# Altium PCB GY80-MOD-.PcbDoc
Units mm, origin at the board's own origin, x right, y up, seen from the top; angles counter-clockwise.
Board outline 127 x 101.6 mm, 4 copper layers (Top Layer, Internal Plane 1, Internal Plane 2, Bottom Layer); 15 components, 16 nets, 70 pads, 2 vias.
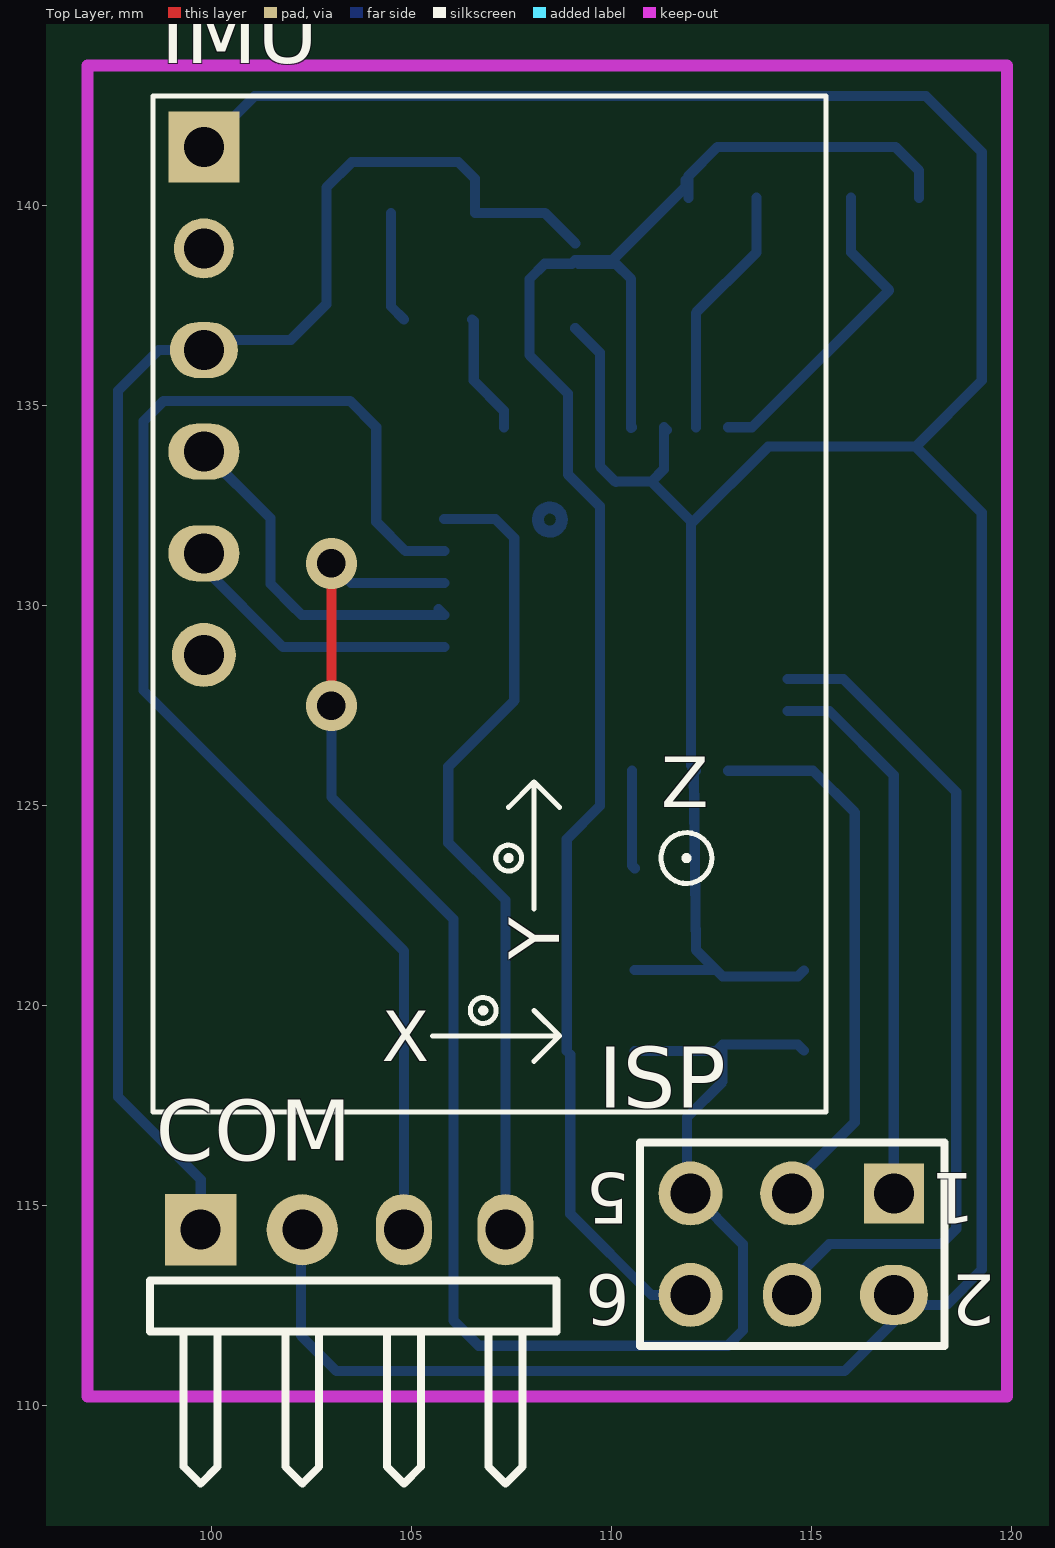
[diagram p0: Top Layer view]
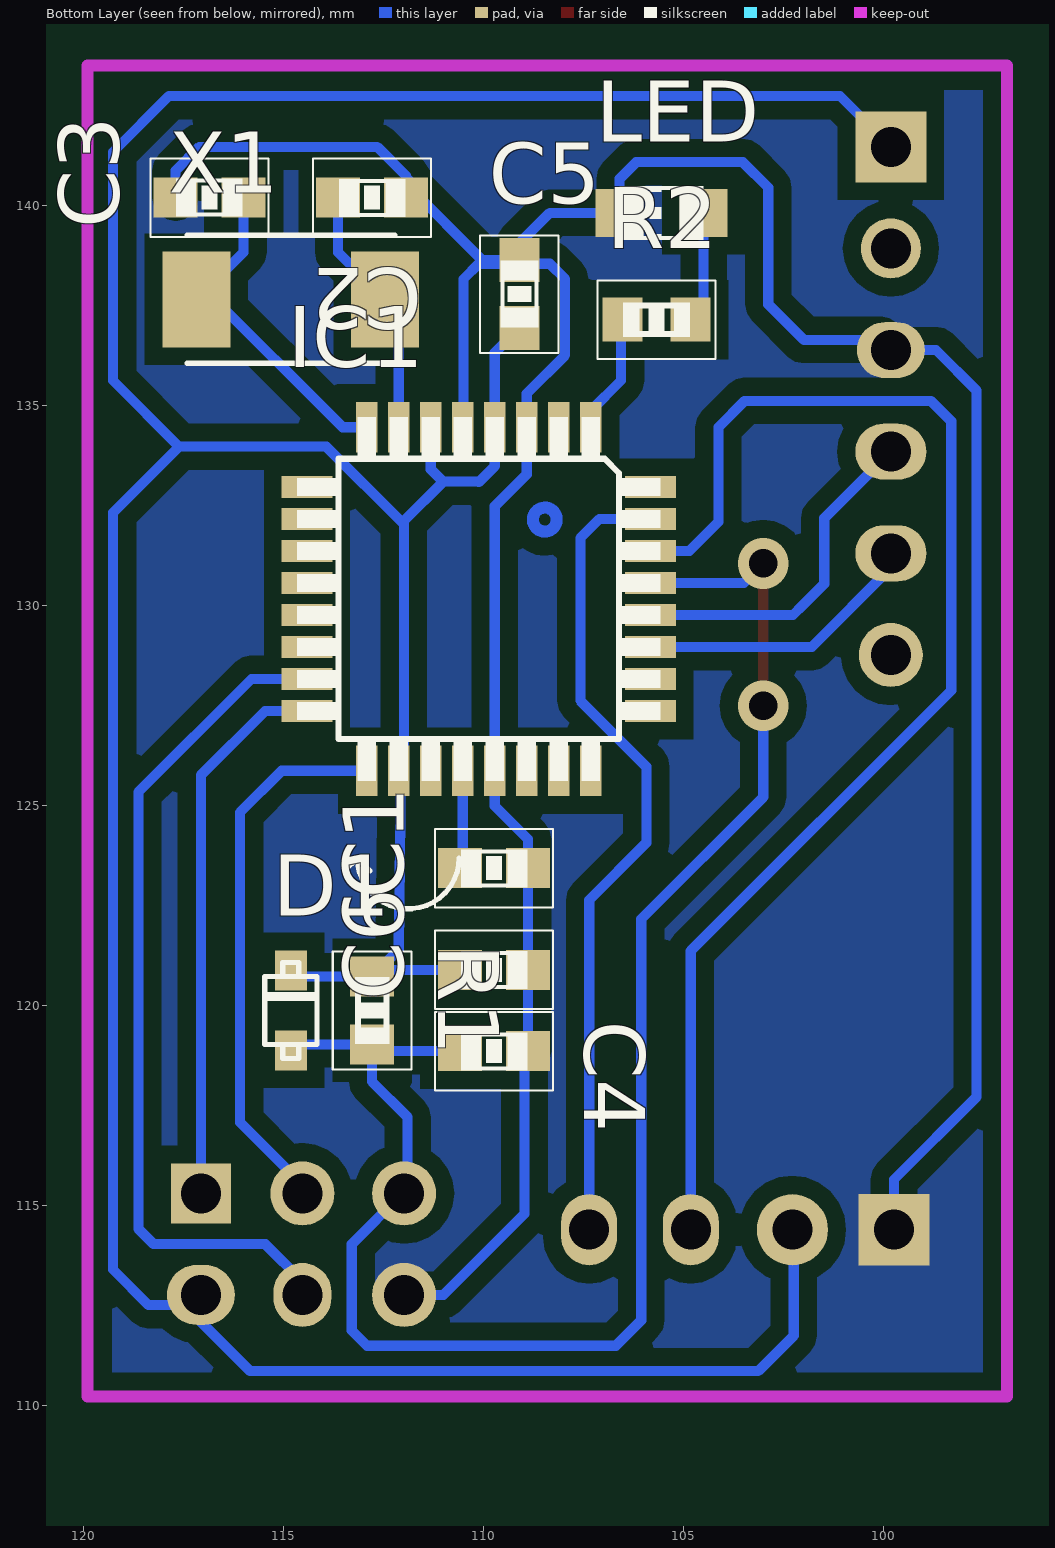
[diagram p1: Bottom Layer view, seen from below]
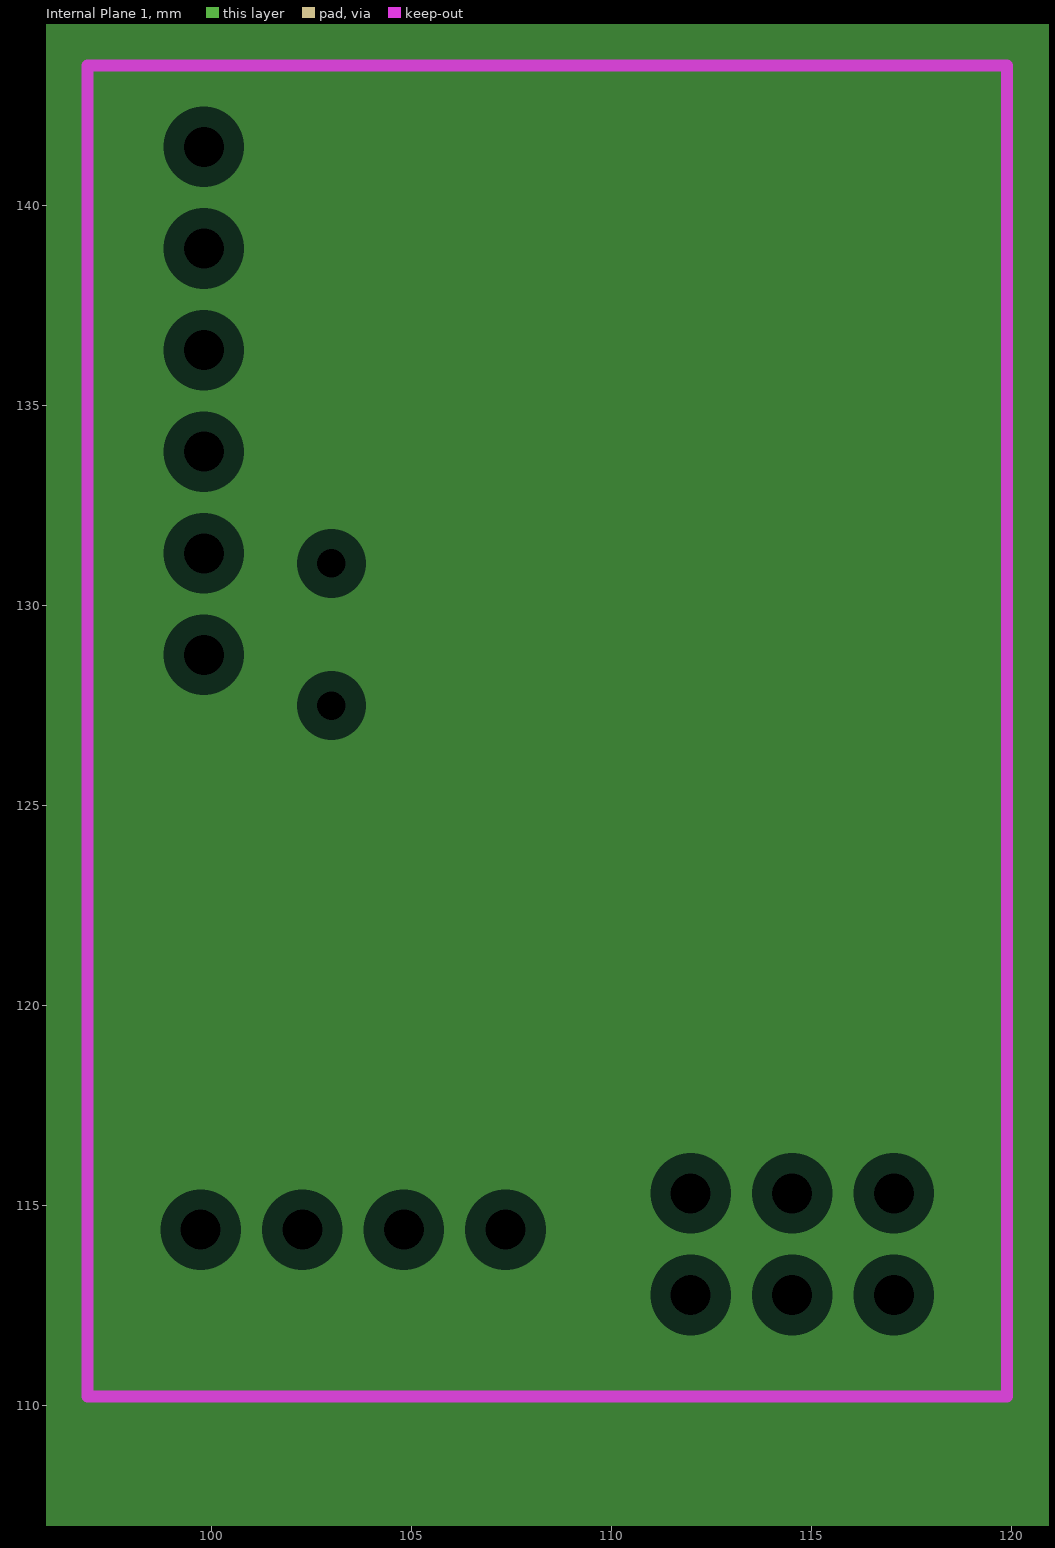
[diagram p2: Internal Plane 1, clearances drawn from the general rule]
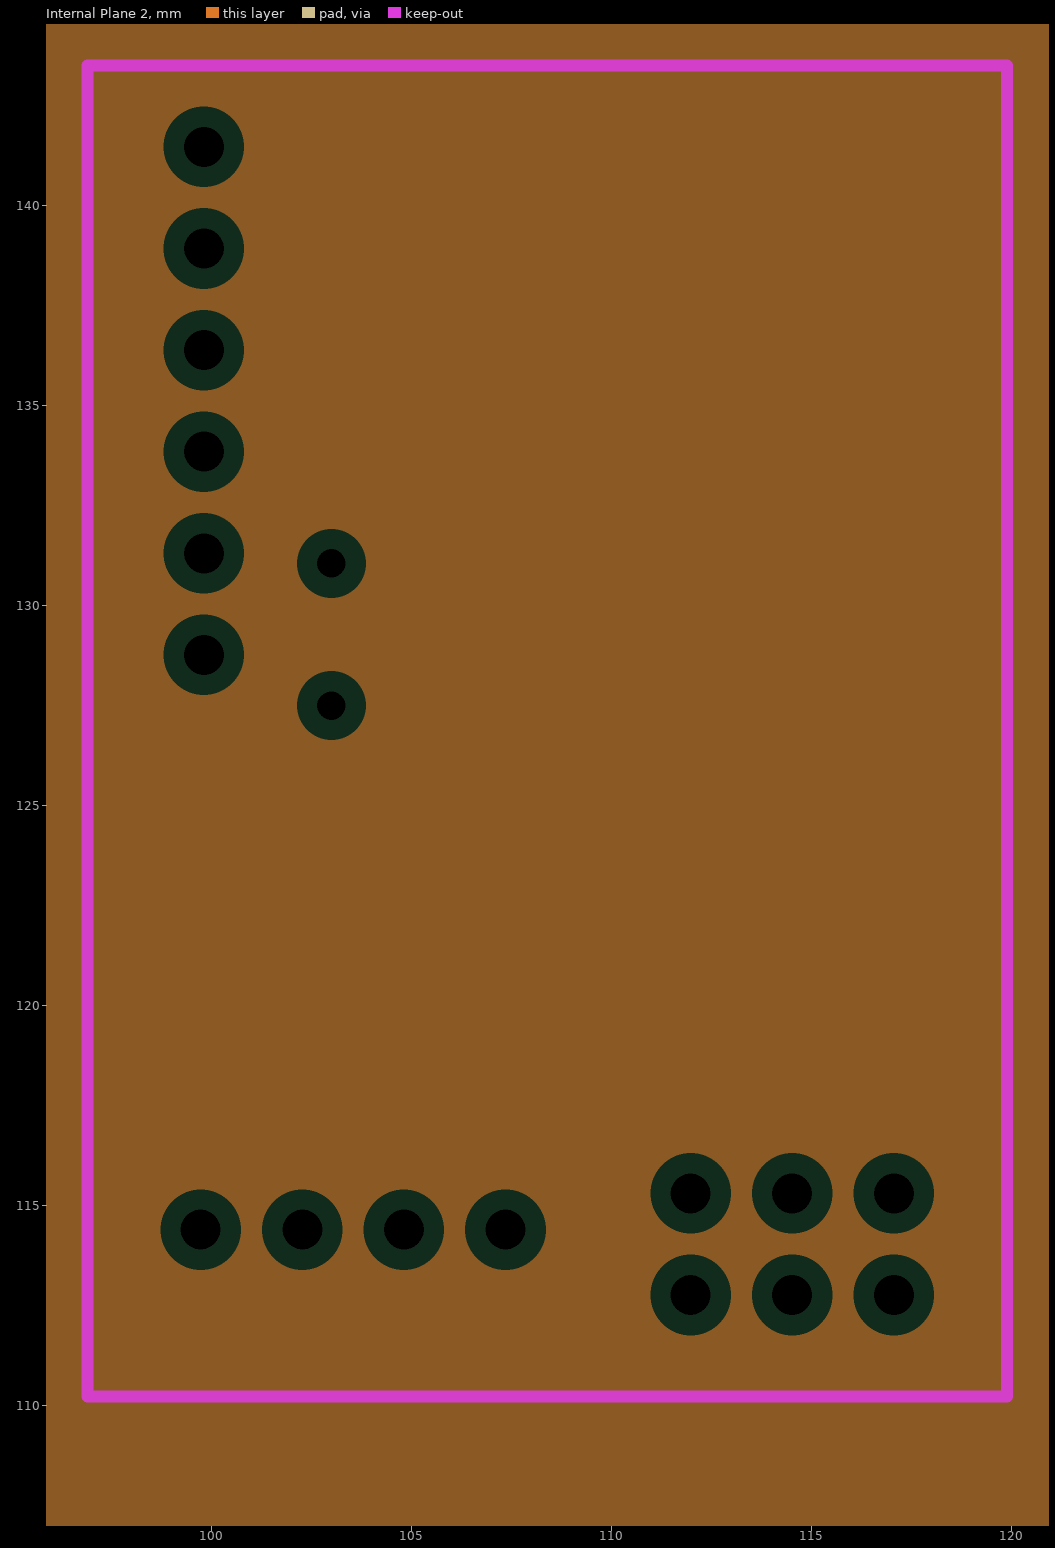
[diagram p3: Internal Plane 2, clearances drawn from the general rule]

## Layer stack, top to bottom
Top Layer: signal copper 0.0356
Dielectric: dielectric 0.32, FR-4, Dk 4.8
Internal Plane 1: plane copper 0.0356
Dielectric: dielectric 0.32, FR-4, Dk 4.8
Internal Plane 2: plane copper 0.0356
Dielectric: dielectric 0.32, FR-4, Dk 4.8
Bottom Layer: signal copper 0.0356

## Board outline
50.8,76.2 177.8,76.2 177.8,177.8 50.8,177.8

## Design rules (kind name [scope] priority, off if disabled: settings)
Clearance [All] p1: gap=0.45
ComponentClearance [All] p1: gap=0.254 collisioncheckmode=3 verticalgap=0.254
PlaneClearance [All] p1: clearance=0.508
PlaneConnect [All] p1: planeconnectstyle=Direct reliefexpansion=0.508 reliefentries=4 reliefconductorwidth=0.254 reliefairgap=0.254
PolygonConnect [All] p1: connectstyle=Direct reliefconductorwidth=0.254 reliefentries=4 polygonreliefangle="90 Angle"
RoutingVias [All] p1: holewidth=0.6 width=1 viastyle="Through Hole" minholewidth=0.711 minwidth=1.27 maxholewidth=0.711 maxwidth=1.27
SolderMaskExpansion [All] p1: expansion=0.102
TestPointUsage [All] p1: valid=0 allowmultiple=FALSE
Testpoint [All] p1: side=15 testpointundercomponent=TRUE minsize=1.016 maxsize=2.54 preferedsize=1.524 minholesize=0 maxholesize=1.016 preferedholesize=0.813 testpointgrid=0.025 style=1023 order=0123456789
Width [All] p1: maxlimit=0.254 minlimit=0.254 preferedwidth=0.254
16 further rules are at their usual default settings.

## Components (designator, comment, footprint, x,y, rotation, side; value= is the part's Value field where it differs from the comment)
C1 "100n" C0603 109.728,123.444 r0 bottom
C2 "22p" C0603 112.776,140.208 r0 bottom
C3 "22p" C0603 116.84,140.208 r180 bottom
C4 "100n" C0603 109.728,118.872 r0 bottom
C5 "100n" C0603 109.093,137.795 r270 bottom
C6 "100n" C0603 109.728,120.904 r0 bottom
COM "Header 4H" HDR1X4H 99.728,114.408 r0 top
D1 "1N4004" SOD-323F 114.808,119.888 r90 bottom
IC1 "ATMEGA328P-AN" TQFP32-10 110.109,130.175 r270 bottom
IMU "Header 6H" GY-80-MINNH 98.537,117.348 r0 top
ISP "Header 3X2" HDR2X3 117.056,115.316 r180 top
LED "Green" CHIP-LED0805 105.537,139.827 r90 bottom
R1 "10K" R0603 112.776,119.888 r270 bottom
R2 "1K" R0603 105.664,137.16 r0 bottom
X1 "16MHz" CRYSTAL-TXC-7A2 114.808,137.668 r180 bottom

## Footprints (in the part's own frame and the unit in brackets; to place one, negate y for a bottom-side part, rotate by r counter-clockwise, add the part's x,y. Pads: shape width x height; smd on the part's side, far side on the other; paste and mask are expansions set on the pad)
C0603 [mm]
  rect 1.1x1 smd: 1(-0.85,0) 2(0.85,0)
  silkscreen extent -1.47,-0.98 1.47,0.98
CHIP-LED0805 [mm]
  rect 1.2x1.2 smd: A(0,-1.05) C(0,1.05)
  silkscreen extent -0.68,-1.05 0.68,1.05
CRYSTAL-TXC-7A2 [mm]
  rect 1.7x2.4 smd: P$1(2.358,0) P$2(-2.358,0)
  silkscreen extent -2.6,-1.6 2.6,1.6
GY-80-MINNH [mm]
  rect 1.778x1.778 hole 1: 1(1.27,24.13)
  round 1.5 hole 1: 2(1.27,21.59)
  oval 1.7x1.4 hole 1: 3(1.27,19.05)
  oval 1.778x1.4 hole 1: 4(1.27,16.51) 5(1.27,13.97)
  round 1.6 hole 1: 6(1.27,11.43)
  silkscreen extent 0,0 16.83,25.4
HDR1X4H [mm] "Connector; Header; 4 Position; Right Angle"
  rect 1.78x1.78 hole 1: 1(0,0)
  round 1.78 hole 1: 2(2.54,0)
  oval 1.4x1.78 hole 1: 3(5.08,0) 4(7.62,0)
  silkscreen extent -1.27,-6.35 8.89,-1.27
HDR2X3 [mm] "Connector; Header; 3x2 Position"
  rect 1.5x1.5 hole 1: 1(0,0)
  oval 1.7x1.5 hole 1: 2(0,2.54)
  round 1.6 hole 1: 3(2.54,0) 5(5.08,0) 6(5.08,2.54)
  oval 1.45x1.6 hole 1: 4(2.54,2.54)
  silkscreen extent -1.27,-1.27 6.35,3.81
R0603 [mm]
  rect 1x1.1 smd: 1(-0.85,0) 2(0.85,0)
  silkscreen extent -1.47,-0.98 1.47,0.98
SOD-323F [mm]
  rect 1x0.8 smd: A(-1,0) C(1,0)
  silkscreen extent -1.2,-0.65 1.2,0.65
TQFP32-10 [mil]
  rect 50x21.5 smd: 1(-169,110.24) 2(-169,78.74) 3(-169.02,47.24) 4(-169,15.75) 5(-169.02,-15.75) 6(-169,-47.24) 7(-169,-78.74) 8(-169,-110.23) 17(169,-110.23) 18(169,-78.74) 19(169,-47.24) 20(169,-15.74) 21(169.02,15.75) 22(169,47.25) 23(169,78.74) 24(169,110.24)
  rect 21.5x50 smd: 9(-110.24,-168.99) 10(-78.74,-168.99) 11(-47.24,-168.99) 12(-15.75,-168.99) 13(15.75,-168.99) 14(47.24,-168.99) 15(78.74,-168.99) 16(110.24,-168.99) 25(110.24,169) 26(78.74,169) 27(47.24,169) 28(15.75,169) 29(-15.75,169) 30(-47.24,169) 31(-78.74,169) 32(-110.24,169)
  Top Layer circle w11.81: c-78.19,65 r11.81
  silkscreen extent -179,-179 179,179

## Part data
C1 C2 C3 C4 C5 C6: library part Cap, "Capacitor"
COM: "Header, 4-Pin, Right Angle"
D1: library part "Diode 1N4004", "1 Amp General Purpose Rectifier"
IC1: "IC MCU 8BIT 32KB FLASH 32TQFP"
IMU: "Header, 6-Pin, Right Angle"
ISP: "Header, 3-Pin, Dual row"
LED: library part LED0, "Typical INFRARED GaAs LED"
R1 R2: library part Res1, "Resistor"
X1: library part XTAL, "Crystal Oscillator"

## Via types
v1: diameter 1.27, hole 0.711, Top Layer to Bottom Layer, 2 vias

## Nets (pads, with @x,y where several pads share a name; then routed paths per layer and width w, separated by ;. In a path a pad name is that pad's centre, name@x,y a point inside that pad or via, vN(x,y) a via of type N, cw(c..) or ccw(c..) an arc to the next point about the centre after c; other vN are vias at no path point)
GND: C1.1 C2.1 C3.1 C4.1 C5.1 C6.1 COM.1 IC1.3 IC1.5 IC1.21 IMU.3 ISP.6 LED.C | length 84.8
  Bottom Layer w0.254: COM.1 99.728,115.664 97.663,117.729 97.663,135.382 98.679,136.398 IMU.3 100.061,136.652 101.981,136.652 102.87,137.541 102.87,140.462 103.505,141.097 106.172,141.097 106.587,140.682 LED.C 108.331,139.827 C5.1@109.093,139.065 ; C4.1 108.878,124.167 109.709,124.998 109.709,132.493 108.909,133.293 108.909,135.312 107.95,136.271 107.95,138.176 108.331,138.557 109.005,138.557 C5.1 110.021,138.645 111.855,140.479 C2.1@111.855,140.645 ; C4.1@108.966,118.784 108.966,114.808 110.998,112.776 ISP.6@112.076,112.776 ; C5.1@109.181,138.557 110.109,138.557 110.49,138.176 110.49,134.487 IC1.5 IC1.5@110.49,134.449 ; C2.1 111.926,140.755 112.649,141.478 117.094,141.478 117.69,140.882 C3.1
MISO: IC1.16 ISP.1 | length 13.8
  Bottom Layer w0.254: IC1.16 115.449,127.375 117.056,125.768 ISP.1
MOSI: IC1.15 ISP.4 | length 21.3
  Bottom Layer w0.254: IC1.15 115.792,128.175 118.618,125.349 118.618,114.427 118.237,114.046 115.443,114.046 114.516,113.119 ISP.4
NetC1_2: C1.2 IC1.20 | length 2.5
  Bottom Layer w0.254: IC1.20 110.509,123.513 C1.2
NetC2_2: C2.2 IC1.7 X1.P$1 | length 6.4
  Bottom Layer w0.254: IC1.7 112.109,137.327 113.626,138.844 C2.2
NetC3_2: C3.2 IC1.8 X1.P$2 | length 8.2
  Bottom Layer w0.254: IC1.8 113.513,134.468 116.939,137.894 115.99,138.844 C3.2
NetC5_1: 
NetIC1_1: IC1.1 R2.2 | length 3
  Bottom Layer w0.254: R2.2 106.553,137.121 106.553,135.636 107.309,134.88 IC1.1
NetLED_1: LED.A R2.1 | length 2.8
  Bottom Layer w0.254: LED.A 104.487,137.487 R2.1
RESET: C4.2 D1.A IC1.29 ISP.5 R1.2 | length 43.3
  Top Layer w0.254: v1(102.997,127.508) v1(102.997,131.064)
  Bottom Layer w0.254: v1(102.997,127.508) 102.997,125.222 106.045,122.174 106.045,112.141 106.68,111.506 112.903,111.506 113.284,111.887 113.284,114.046 112.014,115.316 ISP.5 111.887,115.405 111.887,117.221 112.776,118.11 R1.2 ; v1(102.997,131.064) 103.486,130.575 IC1.29 ; C4.2 112.61,118.872 R1.2 ; D1.A 114.658,119.038 R1.2
RXD: COM.4 IC1.31 | length 20.5
  Bottom Layer w0.254: IC1.31 107.093,132.175 107.569,131.699 107.569,127.635 105.918,125.984 105.918,124.079 107.348,122.649 COM.4
SCK: IC1.17 ISP.3 | length 13.8
  Bottom Layer w0.254: IC1.17 115.037,125.882 116.078,124.841 116.078,117.094 114.516,115.532 ISP.3
SCL: IC1.28 IMU.4 | length 9.1
  Bottom Layer w0.254: IMU.4 101.473,132.192 101.473,130.556 102.108,129.921 ; 101.936,130.093 102.254,129.775 IC1.28 IC1.28@105.67,129.921
SDA: IC1.27 IMU.5 | length 7.2
  Bottom Layer w0.254: IMU.5 99.807,130.952 101.784,128.975 IC1.27
TXD: COM.3 IC1.30 | length 33.6
  Bottom Layer w0.254: COM.3 104.808,121.379 98.298,127.889 98.298,134.62 98.806,135.128 103.46,135.128 104.117,134.47 104.117,132.103 104.845,131.375 IC1.30
VCC: C5.2 C6.2 COM.2 D1.C IC1.4 IC1.6 IC1.18 IMU.1 ISP.2 R1.1 | length 101.3
  Bottom Layer w0.254: IMU.1 101.077,142.748 117.856,142.748 119.253,141.351 119.253,135.636 117.602,133.985 ; COM.2 102.235,114.375 102.235,111.76 103.124,110.871 115.824,110.871 ISP.2@117.056,112.103 ; C5.2 109.709,136.329 109.709,133.496 110.109,133.096 ; 110.122,133.109 110.998,133.109 ; C6.2 R1.1@112.61,120.904 ; IC1.6@111.379,134.397 IC1.6 111.309,133.42 110.998,133.109 ; 111.982,132.048 113.919,133.985 117.602,133.985 ; IC1.18@112.055,125.936 112.056,125.882 112.109,121.405 R1.1 114.658,120.738 D1.C ; IC1.18 111.982,126.009 111.982,132.125 110.998,133.109 ; ISP.2 117.31,112.522 118.364,112.522 119.253,113.411 119.253,132.334 117.602,133.985
pads on no net: IC1.2 IC1.9 IC1.10 IC1.11 IC1.12 IC1.13 IC1.14 IC1.19 IC1.22 IC1.23 IC1.24 IC1.25 IC1.26 IC1.32 IMU.2 IMU.6

## Polygon pours and split planes (outlines as drawn)
GND on Bottom Layer (solid): 97.028,143.383 119.634,143.383 119.634,110.363 97.028,110.363

## Keep-outs
Keep-Out Layer:
  lines w0.3: 96.901,110.236 96.901,143.51 119.888,143.51 119.888,110.236 96.901,110.236

## Dimensions
96.901,110.236 to 96.901,143.51 on Mechanical 1
96.901,110.236 to 119.888,110.236 on Mechanical 1

## Text inside footprints (layer, text, board x,y; h text height)
IMU: Top Overlay "X" at 104.252,118.618 h1.27; Top Overlay "Y" at 108.697,121.158 h1.27 r90; Top Overlay "Z" at 111.237,124.968 h1.27
ISP: Top Overlay "6" at 110.452,113.284 h1.27 r180; Top Overlay "5" at 110.452,115.824 h1.27 r180; Top Overlay "2" at 119.596,113.284 h1.27 r180; Top Overlay "1" at 119.088,115.824 h1.27 r180